# Altium PCB PCB1+5V To +3.3v Regulator.PcbDoc
Units mm, origin at the board's own origin, x right, y up, seen from the top; angles counter-clockwise.
Board outline 27.81 x 10.41 mm, 2 copper layers (Top Layer, Bottom Layer); 5 components, 3 nets, 17 pads, 0 vias.
Unrouted connection lines stored in the file: 1.
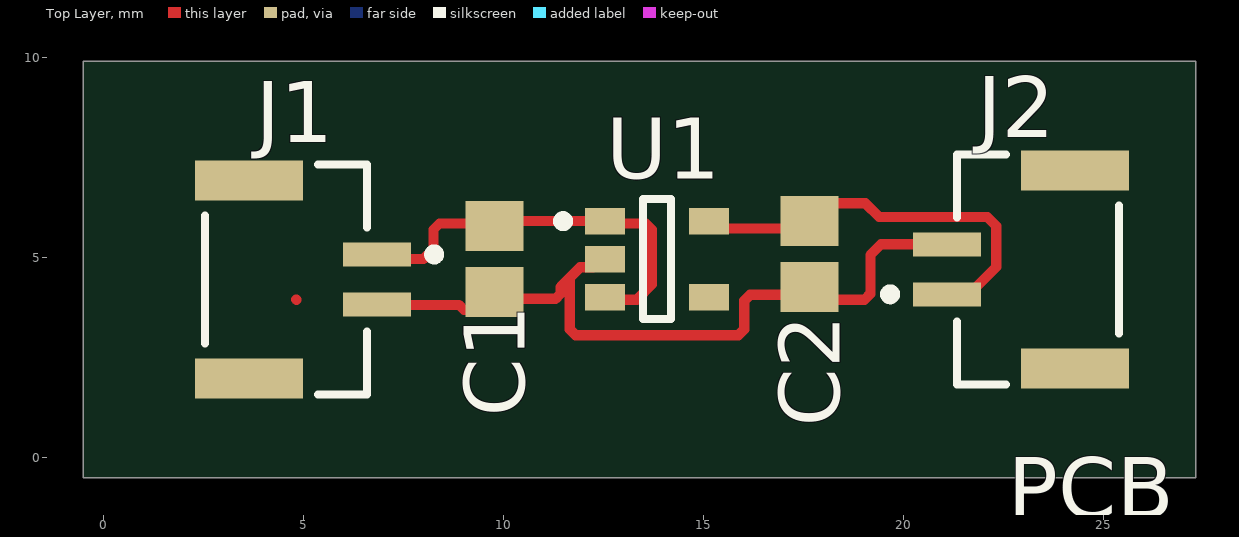
[diagram p0: Top Layer view]
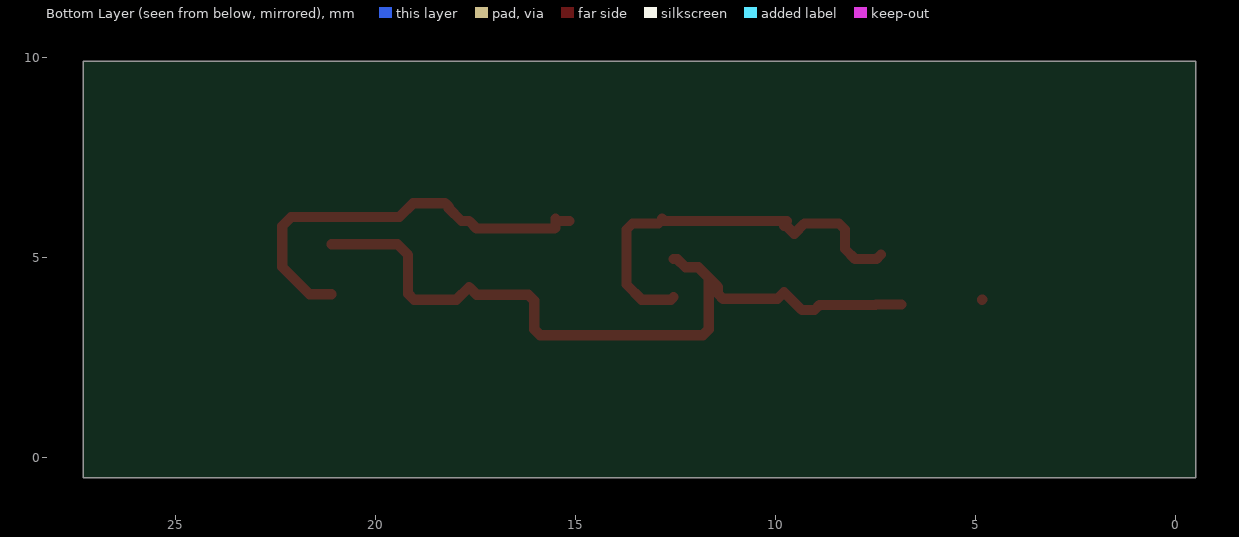
[diagram p1: Bottom Layer view, seen from below]
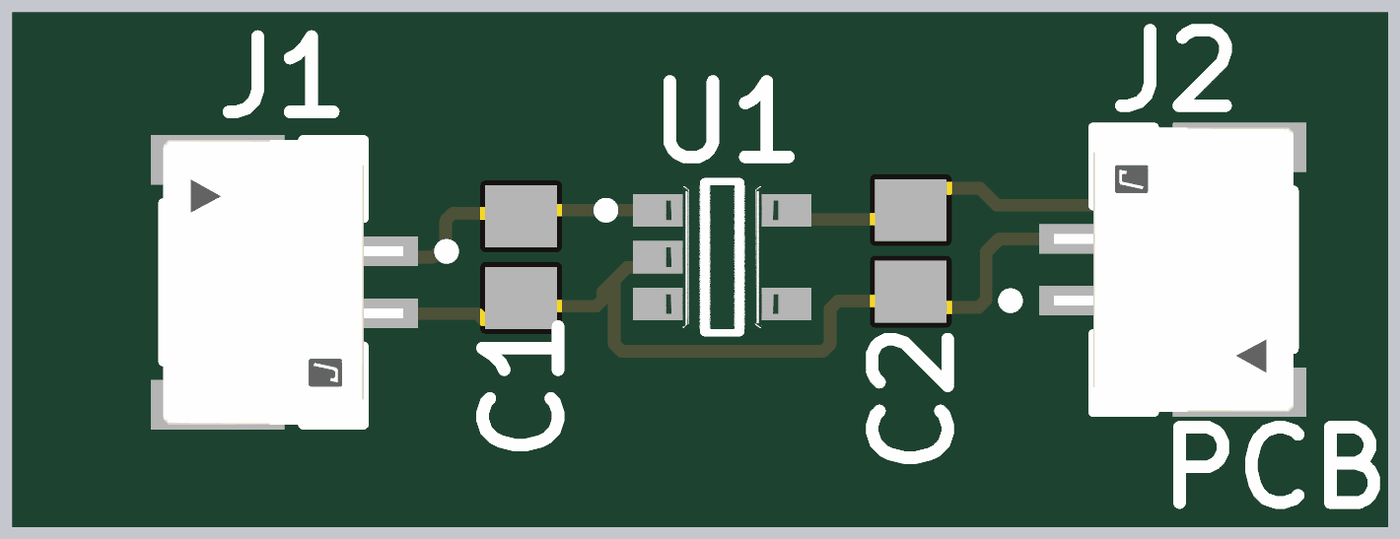
[diagram p2: 3D render of the assembled board from above, using the file's embedded part models]

## Layer stack, top to bottom
Top Solder: solder mask 0.0102, Solder Resist, Dk 3.5
Top Layer: signal copper 0.0356
Dielectric 1: dielectric 0.32, FR-4, Dk 4.8
Bottom Layer: signal copper 0.0356
Bottom Solder: solder mask 0.0102, Solder Resist, Dk 3.5

## Board outline
-0.508,-0.508 -0.508,9.906 27.305,9.906 27.305,-0.508

## Design rules (kind name [scope] priority, off if disabled: settings)
Clearance [All] p1: gap=0.254 ignorepadtopadclearanceinfootprint=FALSE
PolygonConnect [All] p1: connectstyle=Relief reliefconductorwidth=0.254 reliefentries=4 polygonreliefangle="90 Angle" airgapwidth=0.254
RoutingVias [All] p1: holewidth=0.711 width=1.27 viastyle="Through Hole" minholewidth=0.711 minwidth=1.27 maxholewidth=0.711 maxwidth=1.27
SolderMaskExpansion [All] p1: expansion=0.102 istentingtop=FALSE
SupplyNets "Schematic Supply Nets_2" [InNet('+3V3')] p1: voltage=0.000
SupplyNets "Schematic Supply Nets_1" [InNet('+5V')] p2: voltage=0.000
SupplyNets "Schematic Supply Nets" [InNet('GND')] p3: voltage=0.000
Width [All] p1: maxlimit=0.254 minlimit=0.254 preferedwidth=0.254
30 further rules are at their usual default settings.

## Components (designator, comment, footprint, x,y, rotation, side; value= is the part's Value field where it differs from the comment)
C1 "1uf" CAPC2013X145X50NL20T20 9.779,4.953 r90 top
C2 "1uf" CAPC2013X145X50NL20T20 17.653,5.08 r90 top
J1 "SM02B-GHS-TB(LF)(SN)" FP-SM02B-GHS-TB_LF_SN-MFG 4.572,4.445 r270 top
J2 "SM02B-GHS-TB(LF)(SN)" FP-SM02B-GHS-TB_LF_SN-MFG 23.368,4.699 r90 top
U1 "MIC5317-3.3YM5-TR" FP-SOT23-5LD-PL-1-MFG 13.843,4.953 r0 top

## Footprints (in the part's own frame and the unit in brackets; to place one, negate y for a bottom-side part, rotate by r counter-clockwise, add the part's x,y. Pads: shape width x height; smd on the part's side, far side on the other; paste and mask are expansions set on the pad)
CAPC2013X145X50NL20T20 [mm] "Chip Capacitor, 2-Leads, Body 2.00x1.25mm, IPC Medium Density"
  rect 1.25x1.45 smd: 1(-0.825,0) 2(0.825,0)
  body extent -1.1,-0.72 1.1,0.72, height 1.45
FP-SM02B-GHS-TB_LF_SN-MFG [mm]
  rect 0.6x1.7 smd paste+0 mask+0: 1(-0.625,2.275) 2(0.625,2.275)
  rect 1x2.7 smd paste+0 mask+0: 3(-2.475,-0.925) 4(2.475,-0.925)
  silkscreen extent -2.87,-2.02 2.88,3.83, body extent -3.08,-2.37 3.08,3.22, height 0.25
FP-SOT23-5LD-PL-1-MFG [mm]
  rect 1x0.66 smd paste+0 mask+0: 1(-1.3,0.95) 2(-1.3,0) 3(-1.3,-0.95) 4(1.3,-0.95) 5(1.3,0.95)
  silkscreen extent -2.47,-1.5 0.35,1.5, body extent -1.9,-1.6 1.9,1.6, height 0.25

## Part data
C1 C2: library part CMP-2007-01676-1, Manufacturer=Vitramon, Part Number=VJ0805Y105KXQRW1BC
J1 J2: library part CMP-2000-07076-2, "CONN HEADER SMD R/A 2POS 1.25MM", Color=Natural, Current Rating=1A, Package Quantity=2500, Voltage Rating=50V, Connector Type="Outer Shroud Contact", Contact Material=Bronze, Contact Plating=Tin, Contact Type="Male Pin", Fastening Type=Latch, Housing Color=Natural, Housing Material=Nylon, Lead Free="Lead Free", Mount="Surface Mount", Number of Contacts=2, Number of Positions=2, Number of Rows=1, Orientation="Right Angle", Packaging="Tape and Reel", Pitch=0.049inch, Series=GH, Termination=Solder
U1: library part CMP-06324-000116-1, "IC REG LINEAR 3.3V 150MA SOT23-5", Case/Package=SOT-23-5, Dropout Voltage=155mV, Max Input Voltage=6V, Max Operating Temperature=125°C, Min Current Limit=200mA, Min Input Voltage=2.5V, Min Operating Temperature=-40°C, Output Current=150mA, Output Voltage=3.3V, Package Quantity=3000, Power Supply Rejection Ratio (PSRR)=70dB, Mount="Surface Mount", Number of Outputs=1, Number of Regulators=1, Packaging="Tape and Reel", RoHS Compliant=No, Series=-

## Nets (pads, with @x,y where several pads share a name; then routed paths per layer and width w, separated by ;. In a path a pad name is that pad's centre, name@x,y a point inside that pad or via, vN(x,y) a via of type N, cw(c..) or ccw(c..) an arc to the next point about the centre after c; other vN are vias at no path point)
+3V3: C2.2 J2.1 U1.5 | length 10.5
  Top Layer w0.254: U1.5 15.428,5.903 15.494,5.969 15.494,5.737 15.516,5.715 17.463,5.715 C2.2 17.843,5.905 18.161,6.223 18.161,6.26 18.251,6.35 19.05,6.35 19.395,6.005 22.101,6.005 22.324,5.782 22.324,4.755 21.643,4.074 J2.1
+5V: C1.2 J1.1 U1.1 U1.3 | length 10.4
  Top Layer w0.254: J1.1@7.356,5.07 7.473,4.953 8.001,4.953 8.255,5.207 8.255,5.693 8.404,5.842 9.271,5.842 9.525,5.588 9.715,5.778 C1.2 9.779,5.837 9.713,5.903 U1.1 12.761,5.903 12.827,5.969 12.827,5.931 12.916,5.842 13.567,5.842 13.716,5.693 13.716,4.318 13.335,3.937 12.609,3.937 U1.3
GND: C1.1 C2.1 J1.2 J2.2 U1.2 | length 19.5
  Top Layer w0.254: 4.816,3.947 4.826,3.937 ; J1.2 7.483,3.82 7.493,3.81 8.89,3.81 9.017,3.683 9.334,3.683 C1.1 9.944,3.963 11.308,3.963 11.43,4.086 11.43,4.259 11.662,4.491 ; U1.2 12.446,4.953 12.243,4.75 11.921,4.75 11.662,4.491 ; J2.2 19.443,5.324 19.177,5.058 19.177,4.086 19.028,3.937 17.971,3.937 C2.1 17.462,4.064 16.173,4.064 16.024,3.915 16.024,3.197 15.875,3.048 11.811,3.048 11.662,3.197 11.662,4.491
pads on no net: J1.3 J1.4 J2.3 J2.4 U1.4

## Silkscreen, mask and mechanical layers (free items; w line width, h text height)
Top Overlay:
  text "PCB" at 22.606,-1.524 h1.52
Mechanical 1:
  lines w0.254: -0.508,-0.508 -0.508,9.906 27.305,9.906 27.305,-0.254 27.305,-0.508 -0.508,-0.508